# Altium PCB HAB_V01R01.PcbDoc (part 3 of 3)
Units mil, origin at the board's own origin, x right, y up, seen from the top; angles counter-clockwise.
Board outline 3149.61 x 1574.8 mil, 4 copper layers ([L1] Top Layer, [L2] GND, [L3] PWR, [L4] Bottom Layer), stack 61.811 mil thick; 74 components, 79 nets, 377 pads, 164 vias.
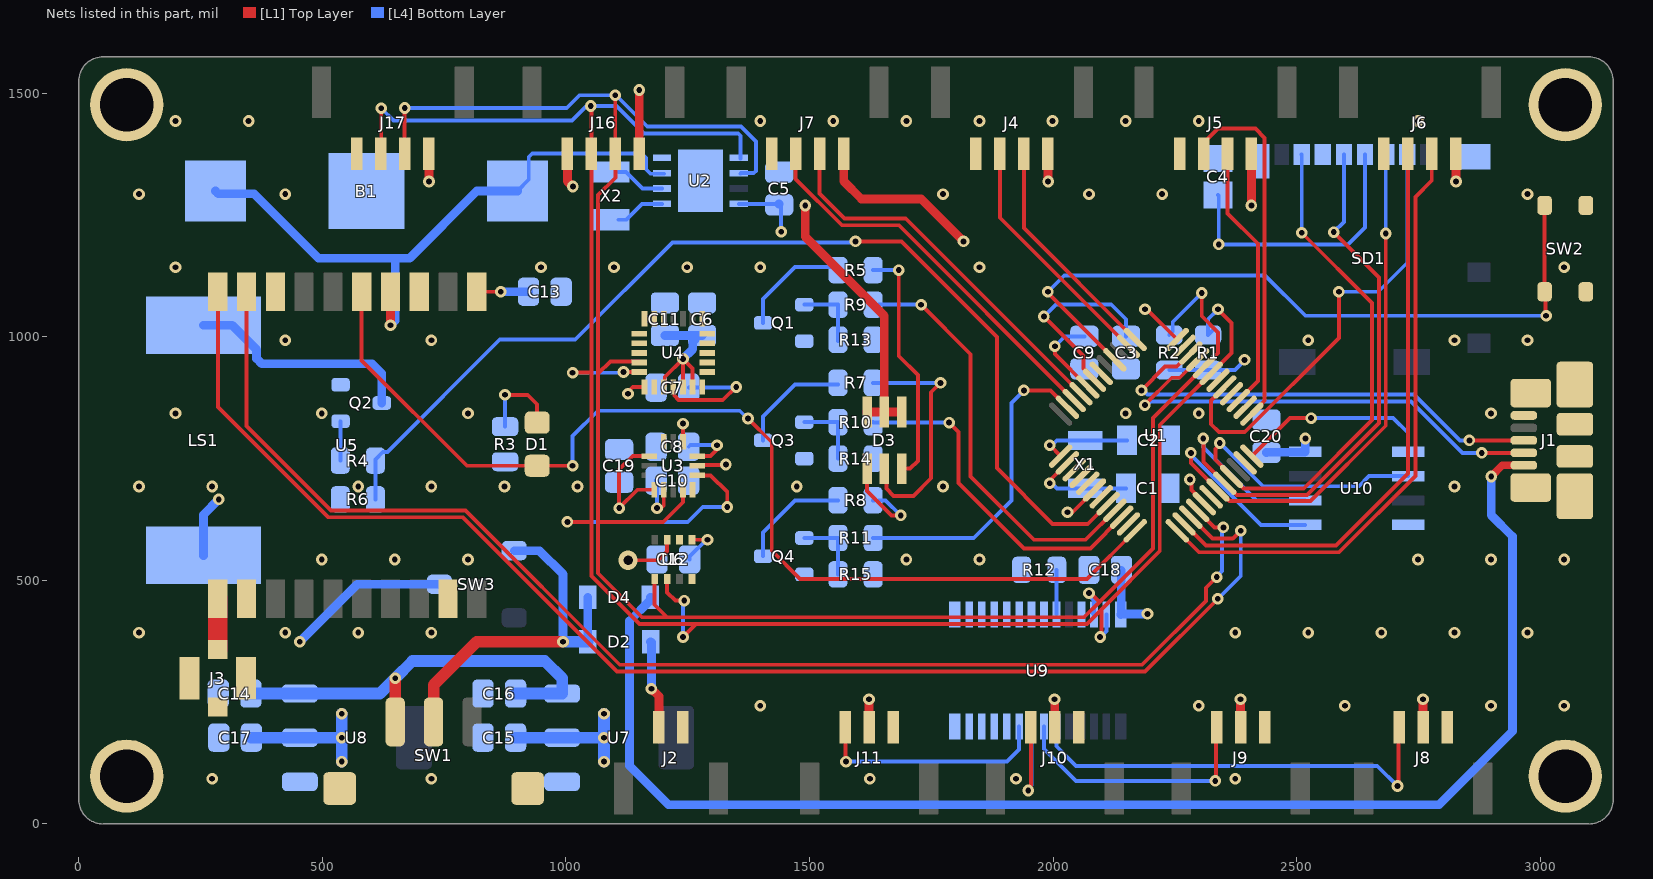
[diagram p4: the nets of this part, all layers, seen from the top]

## Part data (continued)
X1: library part CMP-2000-07587-1, "Tuning Fork Crystal, 32.768 KHz, +/- 20 ppm, -40 to 85 degC, 2-Pin SMD, RoHS, Tape and Reel", Case\/Package=SMD/SMT, ESR (Equivalent Series Resistance)=55KOhm, Frequency=32.768KHz, Frequency Tolerance=20ppm, Load Capacitance=6pF, Manufacturer=Abracon, Max Operating Temperature=85degC, Min Operating Temperature=-40degC, Package Description="2-Pin Surface Mount Device, Body 3.2 x 1.5 mm", Package Quantity=3000, Package Reference=ABS07, Series Resistance=60KOhm, Datasheet URL=http://www.abracon.com/Resonators/ABS07-120-32.768kHz-T.pdf, Datasheet Version=11/2014, Depth=1.5mm, Height=0.035inch, Lead Free=LeadFree, Length=3.2mm, Manufacturer URL=http://www.abracon.com/, Mount=SurfaceMount, Mounting Technology=SurfaceMount, Number of Pins=2, Packaging=TapeandReel, Radiation Hardening=No, REACH SVHC=NoSVHC, RoHSCompliant=True, Termination=SMD/SMT, Tolerance=20ppm, Width=0.061inch
X2: "In a Pack of 10, Abracon 32.768kHz Crystal Unit ±20ppm SMD 2-Pin 3.2 x 1.5 x 0.9mm", Case/Package=CSMD, ESR (Equivalent Series Resistance)=70kR, Frequency=32.768kHz, Frequency Stability=20ppm, Insulation Resistance=500MR, Load Capacitance=7pF, Manufacturer=Abracon, Max Operating Temperature=85°C, Min Operating Temperature=-40°C, Package Quantity=3000, Supplier Part Number 1=535-9543-1-ND, Category=Crystals, ComponentLink1Description=https://datasheet.ciiva.com/3174/abs07-3174144.pdf?src-supplier=Avnet, ComponentLink1URL=https://datasheet.ciiva.com/3174/abs07-3174144.pdf?src-supplier=Avnet, ComponentLink2Description=https://datasheet.ciiva.com/855/abs07-855947.pdf?src-supplier=Digi-Key, ComponentLink2URL=https://datasheet.ciiva.com/855/abs07-855947.pdf?src-supplier=Digi-Key, ComponentLink3Description=https://datasheet.ciiva.com/16199/abs07-16199467.pdf?src-supplier=Future+Electronics, ComponentLink3URL=https://datasheet.ciiva.com/16199/abs07-16199467.pdf?src-supplier=Future+Electronics, ComponentLink4Description=https://datasheet.ciiva.com/8344/abs07-8344589.pdf?src-supplier=Avnet, ComponentLink4URL=https://datasheet.ciiva.com/8344/abs07-8344589.pdf?src-supplier=Avnet, ComponentLink5Description=https://datasheet.ciiva.com/855/abs07-855945.pdf?src-supplier=Digi-Key, ComponentLink5URL=https://datasheet.ciiva.com/855/abs07-855945.pdf?src-supplier=Digi-Key, ComponentLink6Description=https://datasheet.ciiva.com/855/abs07-855946.pdf?src-supplier=Digi-Key, ComponentLink6URL=https://datasheet.ciiva.com/855/abs07-855946.pdf?src-supplier=Digi-Key, Depth=1.5mm, Frequency Tolerance=20ppm, Height=0.035inch, Lead Free="Lead Free", Length=3.2mm, Manufacturer Part Number=ABS07-32.768KHZ-7-T, Mount="Surface Mount", Number of Pins=2, Packaging="Tape and Reel", Pricing 1="1=1.09000, 10=0.96100, 50=0.89880, 100=0.79420, 500=0.75240, 1000=0.62700 (USD)", Radiation Hardening=No, REACH SVHC="No SVHC", RoHS=Yes, Series Resistance=70kR, Stock 1=166337, Supplier 1=Digi-Key, Termination=SMD/SMT, Tolerance=20ppm, Width=1.5mm

## Free pads (board coordinates)
  round 150 hole 110: M1(98.43,1476.38) M2(98.43,98.43) M3(3051.18,98.43) M4(3051.18,1476.38)

## Via types
v1: diameter 24, hole 12, [L1] Top Layer to [L4] Bottom Layer, tented both sides, 163 vias
v2: diameter 39.37, hole 19.68, [L1] Top Layer to [L4] Bottom Layer, 1 vias

## Nets (pads, with @x,y where several pads share a name; then routed paths per layer and width w, separated by ;. In a path a pad name is that pad's centre, name@x,y a point inside that pad or via, vN(x,y) a via of type N, cw(c..) or ccw(c..) an arc to the next point about the centre after c; other vN are vias at no path point)
3V3: C4.1 C5.2 C6.2 C9.2 C11.2 C12.2 C13.2 C15.2 C18.2 C19.2 C20.2 J7.1 R1.2 R2.2 SD1.4 U1.6 U1.17 U1.36 U1.44 U2.8 U3.1 U3.7 U3.10 U3.14 U4.13 U4.15 U4.17 U4.18 U5.1 U6.6 U6.8 U7.2 U9.28 U10.8 | length 3237.1
  [L1] Top Layer w8: U5.1@816.93,1092.52 v1(866.14,1092.52) ; v1(1127.22,883.14) 1127.22,887.27 1137.01,897.06 1161.38,897.06 U4.13@1161.42,897.09 ; v2(1127.63,541.34) 1189.66,541.34 1207.68,559.35 U6.6@1207.68,583.51 ; U3.14@1171.26,755 1137.01,755 1109.25,727.24 v1(1109.25,648.31) 1147.05,686.1 U3.1@1181.1,686.1 ; U4.15@1200.79,897.09 1202.69,899 1202.69,917.26 v1(1240.16,954.72) ; U3.10@1240.16,784.53 v1(1240.16,821.85) ; U4.17@1240.16,897.09 v1(1240.16,954.72) ; U6.8@1258.86,583.51 v1(1290.35,583.51) ; U4.18@1259.84,897.09 1259.84,935.04 v1(1240.16,954.72) ; U3.7@1269.69,735.31 1270.96,736.59 1326.97,736.59 v1(1328.24,737.86) ; v1(2003.46,980.57) 2003.46,964.62 U1.44@2071.03,897.06 ; v1(2029.27,639.76) 2039.23,639.76 U1.6@2084.95,685.48 ; v1(2188.35,1056.43) 2192.82,1056.43 U1.36@2254.76,994.49 ; v1(2280.56,706.95) 2283.62,703.89 2283.62,685.5 2310.44,658.67 U1.17@2310.44,657.64
  [L1] Top Layer w18: J7.1@1570.12,1375.73 1570.12,1319.15 1606.47,1282.8 1729.01,1282.8 v1(1815.94,1195.87)
  [L4] Bottom Layer w8: v1(1109.25,648.31) C19.2@1109.25,701.7 ; C12.2@1253.94,543.16 1253.94,548.67 1288.78,583.51 v1(1290.35,583.51) ; U2.8@1354.72,1272.72 C5.2@1437.12,1272.72 ; C5.2@1441.59,1269.69 1441.59,1215.89 v1(1441.93,1215.55) ; v1(2003.46,980.57) 2023.87,1000.98 C9.2@2063.98,1000.98 ; R2.2@2238.19,931.5 R1.2@2317.91,931.5 2373.43,931.5 2392.93,951 v1(2392.93,952.73) ; C4.1@2338.28,1291.34 2339.92,1289.7 v1(2339.92,1189.73) 2605.58,1189.73 2640.26,1224.41 SD1.4@2640.26,1374.51
  [L4] Bottom Layer w18: v1(866.14,1092.52) C13.2@923.23,1092.52 ; C11.2@1203.23,1002.65 C6.2@1272.89,1002.65 ; v1(1240.16,954.72) 1260.2,974.77 1260.2,989.96 C6.2@1272.89,1002.65 ; C6.2@1279.53,1002.65 C6.2@1272.89,1002.65 ; C5.2@1437.12,1272.72 C5.2@1437.23,1272.61 ; U9.28@2138.78,430.12 2139.94,431.27 v1(2193.76,431.27) ; U9.28@2139.59,431.27 C18.2@2139.59,520.84 ; C20.2@2437.7,762.31 2438.53,763.14 2516.45,763.14 U10.8@2517.28,763.98 2517.66,764.36 v1(2517.66,791.18)
  [L4] Bottom Layer w24: C15.2@896.65,177.17 U7.2@992.13,177.17 v1(1078.25,177.17) ; v1(1078.25,127.95) v1(1078.25,177.17) ; v1(1078.25,226.38) v1(1078.25,177.17)
5V0: C17.2 D3.4 D3.5 D3.6 J4.1 J5.1 J6.1 J8.2 J9.2 J10.2 J11.2 J16.1 J17.1 LS1.1 SW3.2 U8.2 | length 1943.8
  [L1] Top Layer w8: v1(1622.02,255.91) v1@1622.28,255.65 ; J11.2@1622.28,199.08 J11.2@1622.54,198.82 ; v1(2406.85,1269.69) v1@2407.07,1269.91
  [L1] Top Layer w18: v1@718.76,1319.15 J17.1@718.76,1375.73 ; v1(1150.32,1506.66) 1150.32,1376.4 1150.66,1376.06 J16.1@1150.59,1375.98 ; v1(1491.15,1269.7) 1491.15,1205.7 1653.54,1043.31 D3.5@1653.54,845.47 ; D3.6@1618.11,845.47 D3.5@1653.54,845.47 ; J11.2@1622.28,199.08 v1@1622.28,255.65 ; D3.4@1688.98,845.47 D3.5@1653.54,845.47 ; v1@1989.41,1319.15 J4.1@1989.41,1375.73 ; J10.2@2003.2,199.08 v1@2003.2,255.65 ; J9.2@2384.72,199.08 v1@2384.72,255.65 ; v1@2407.07,1269.91 J5.1@2407.07,1375.98 ; J8.2@2759.34,199.08 v1@2759.34,255.65 ; v1@2826.62,1319.15 J6.1@2826.62,1375.73
  [L4] Bottom Layer w18: LS1.1@255.91,551.18 255.91,634.84 v1(287.4,666.34) ; v1(453.74,374.18) 571.68,492.13 SW3.2@740.16,492.13
  [L4] Bottom Layer w24: C17.2@354.33,177.17 U8.2@453.74,177.17 v1(539.86,177.17) ; v1(539.86,127.95) v1(539.86,177.17) ; v1(539.86,226.38) v1(539.86,177.17)
  other v1: 2002.95,255.91 2384.46,255.91 2759.08,255.91 719.02,1318.9 1989.67,1318.9 2826.87,1318.9
GND: B1.2 C1.2 C2.2 C3.1 C4.2 C5.1 C6.1 C7.1 C8.1 C9.1 C10.1 C11.1 C12.1 C13.1 C14.1 C15.1 C16.1 C17.1 C18.1 C19.1 C20.1 J1.0 J1.5 J2.2 J3.2 J3.3 J3.4 J4.4 J5.4 J6.4 J7.4 J8.3 J9.3 J10.3 J11.3 J16.4 J17.4 pad.M1 pad.M2 pad.M3 pad.M4 Q1.2 Q2.2 Q3.2 Q4.2 R3.1 R6.1 R12.2 R13.1 R14.1 R15.1 SD1.6 SD1.11 SD1.12 SW1.0 SW2.3 SW2.4 U1.5 U1.18 U1.35 U1.42 U2.4 U2.9 U3.5 U3.12 U4.1 U4.5 U4.6 U4.7 U4.8 U4.9 U4.10 U4.14 U4.19 U4.20 U4.21 U4.22 U4.23 U4.24 U5.3 U5.8 U5.12 U5.19 U6.1 U6.7 U7.1 U8.1 U9.14 U9.25 U10.4 | length 72.3
  [L1] Top Layer w18: J16.4@1002.95,1375.98 1002.95,1319.54 v1(1014.15,1308.34)
  other v1: 273.74,92.83 723.74,92.83 1623.74,92.83 1923.74,92.83 2373.74,92.83 1398.74,242.83 2298.74,242.83 2598.74,242.83 2898.74,242.83 3048.74,242.83 123.74,392.83 423.74,392.83 573.74,392.83 723.74,392.83 2373.74,392.83 2523.74,392.83 2673.74,392.83 2823.74,392.83 2973.74,392.83 498.74,542.83 648.74,542.83 798.74,542.83 1698.74,542.83 1848.74,542.83 2748.74,542.83 2898.74,542.83 3048.74,542.83 123.74,692.83 273.74,692.83 573.74,692.83 723.74,692.83 873.74,692.83 1023.74,692.83 1473.74,692.83 1773.74,692.83 2823.74,692.83 198.74,842.83 498.74,842.83 798.74,842.83 2148.74,842.83 2298.74,842.83 2898.74,842.83 423.74,992.83 723.74,992.83 2523.74,992.83 2823.74,992.83 2973.74,992.83 198.74,1142.83 948.74,1142.83 1098.74,1142.83 1248.74,1142.83 1398.74,1142.83 1848.74,1142.83 3048.74,1142.83 123.74,1292.83 423.74,1292.83 1773.74,1292.83 2073.74,1292.83 2223.74,1292.83 2973.74,1292.83 198.74,1442.83 348.74,1442.83 1398.74,1442.83 1548.74,1442.83 1698.74,1442.83 1848.74,1442.83 1998.74,1442.83 2148.74,1442.83 2298.74,1442.83 2748.74,1442.83
GPS_EX_ANT: J3.1 U5.11 | length 104.3
  [L1] Top Layer w39.5: J3.1@285.43,358.27 U5.11@285.43,462.6
MCU_A0: U1.3 | length 0
MCU_A1: U1.7 | length 0
MCU_A2: R4.1 R6.2 U1.8 | length 2186.6
  [L1] Top Layer w8: v1(1594.49,1195.87) 1688.35,1195.87 1884.4,999.81 1884.4,730.36 1998.88,615.88 2071.03,615.88 U1.8@2112.79,657.64
  [L4] Bottom Layer w8: R6.2@608.86,666.34 608.86,748.29 623.89,763.32 633.4,763.32 864.17,994.09 1019.17,994.09 1218.63,1193.55 1592.17,1193.55 v1(1594.49,1195.87)
MCU_A3: R9.2 U1.9 | length 870.5
  [L1] Top Layer w8: v1(1729.01,1065.94) 1830.71,964.24 1830.71,713.59 1960.79,583.51 2066.49,583.51 U1.9@2126.71,643.72
  [L4] Bottom Layer w8: R9.2@1630.51,1065.94 1633.74,1069.17 1636.97,1065.94 v1(1729.01,1065.94)
MCU_A4: R10.2 U1.10 | length 705.1
  [L1] Top Layer w8: v1(1786.42,823.9) 1806.1,804.21 1806.1,699.69 1939.94,565.84 2076.67,565.84 U1.10@2140.63,629.8
  [L4] Bottom Layer w8: R10.2@1630.51,824.8 1631.42,823.9 v1(1786.42,823.9)
MCU_A5: R11.2 U1.47 | length 655.8
  [L1] Top Layer w8: v1(1939.94,890.01) 1994.56,890.01 U1.47@2029.27,855.3
  [L4] Bottom Layer w8: R11.2@1630.51,587.04 1837.04,587.04 1914.37,664.37 1914.37,864.44 v1(1939.94,890.01)
MCU_AREF: U1.4
MCU_D2: U1.23
MCU_D5: U1.24 U10.1 | length 405.3
  [L1] Top Layer w8: U1.24@2406.85,755.08 U1.24@2407.88,755.08 2485.9,833.1 v1(2529.53,833.1)
  [L4] Bottom Layer w8: v1(2529.53,833.1) 2697.85,833.1 2728.78,802.17 U10.1@2728.78,763.98
MCU_D6: SD1.2 U1.29 | length 920.7
  [L1] Top Layer w8: U1.29@2353.23,897.06 U1.29@2352.2,897.06 2324.2,869.06 2324.2,820.53 2340.37,804.36 2393.35,804.36 2586.43,997.44 v1(2586.43,1092.52)
  [L4] Bottom Layer w8: v1(2586.43,1092.52) 2667.32,1092.52 2726.87,1152.07 SD1.2@2726.87,1374.51
MCU_D7: U1.30
MCU_D8: U1.11
MCU_D9: D1.A U1.12 U5.5 | length 2215.2
  [L1] Top Layer w8: U5.5@580.71,1092.52 580.71,951.21 796.6,735.31 D1.A@940.94,735.31 v1(1013.78,735.31) ; v1(1373.81,832.22) 1422.43,783.6 1422.43,561.01 1480.35,503.09 2069.59,503.09 U1.12@2168.46,601.96
  [L4] Bottom Layer w8: v1(1013.78,735.31) 1013.78,796.02 1066.03,848.27 1356.71,848.27 1372.76,832.22 v1(1373.81,832.22)
MCU_D12: U1.28
MCU_D13: U1.26 | length 1
  [L1] Top Layer w8: U1.26@2392.93,855.3 U1.26@2393.96,855.3
MCU_MISO: SD1.7 U1.21 U10.2 | length 1481.1
  [L1] Top Layer w8: v1(2342.09,782.16) 2342.09,778.74 2332.83,769.47 2332.83,747.64 2366.12,714.35 U1.21@2366.12,713.32 U1.21@2366.12,713.32 2390.81,688.69 2514.41,688.69 2654.65,828.93 2654.65,1069.17 v1(2510.33,1213.49)
  [L4] Bottom Layer w8: v1(2342.09,782.16) 2430.94,693.31 2627.85,693.31 2648.52,713.98 U10.2@2728.78,713.98 ; v1(2510.33,1213.49) 2510.33,1373.53 2509.84,1374.02 SD1.7@2510.33,1374.51
MCU_MOSI: SD1.3 U1.19 U10.5 | length 1376.6
  [L1] Top Layer w8: v1(2282.6,761.81) 2282.6,741.16 U1.19@2338.28,685.48 2339.31,685.48 2361.94,662.86 2528.17,662.86 2682.67,817.35 v1(2682.67,1211.86)
  [L4] Bottom Layer w8: v1(2282.6,761.81) 2282.6,757.6 2426.22,613.98 U10.5@2517.28,613.98 ; v1(2682.67,1211.86) 2682.67,1364.95 2678.34,1369.28 SD1.3@2683.56,1374.51
MCU_RESET#: SW2.1 SW2.2 U1.40 | length 1495.2
  [L1] Top Layer w8: v1(1989.16,1092.52) 1989.16,1090.28 U1.40@2126.71,952.73 ; SW2.1@3008.86,1269.69 SW2.2@3008.86,1092.52 3010.33,1091.04 3010.33,1044.78 v1(3011.81,1043.31)
  [L4] Bottom Layer w8: v1(1989.16,1092.52) 2022.72,1126.08 2434.89,1126.08 2517.66,1043.31 v1(3011.81,1043.31)
MCU_RX_1: U1.16 U5.9 | length 2736.2
  [L1] Top Layer w8: U5.9@344.49,1092.52 344.49,816.93 517.69,643.72 793.4,643.72 1110.35,326.77 2182.55,326.77 2313.88,458.1 2313.88,484.89 v1(2335.76,506.78) ; U1.16@2296.52,642.69 U1.16@2296.52,643.72 2331.37,608.87 v1(2349.35,608.87)
  [L4] Bottom Layer w8: v1(2335.76,506.78) 2335.76,508.34 2346.89,519.46 2346.89,606.41 v1(2349.35,608.87)
MCU_RX_2: J5.3 U1.25 | length 745.1
  [L1] Top Layer w8: J5.3@2308.64,1375.98 2308.64,1397.64 2338.17,1427.17 2415.31,1427.17 2434.19,1408.28 2434.19,868.72 2407.88,842.41 U1.25@2407.88,841.38
MCU_RX_3: J6.3 U1.14 | length 1195.5
  [L1] Top Layer w8: U1.14@2268.68,615.88 2269.72,615.88 2313.88,571.72 2580.63,571.72 2727.94,719.03 J6.3@2727.94,1375.98
MCU_RX_5: J4.3 U1.38 | length 504.7
  [L1] Top Layer w8: J4.3@1890.73,1375.98 1890.73,1244.39 U1.38@2154.54,980.57
MCU_SCK: SD1.5 U1.20 U10.6 | length 1368.5
  [L1] Top Layer w8: v1(2308.21,791.18) 2308.21,743.39 U1.20@2352.2,699.4 2352.88,699.4 2376.89,675.39 2520.91,675.39 2668.67,823.15 2668.67,1121.97 v1(2575.82,1214.82)
  [L4] Bottom Layer w8: v1(2308.21,791.18) 2308.21,773.13 2416.97,664.37 2516.89,664.37 U10.6@2517.28,663.98 ; v1(2575.82,1214.82) 2596.76,1235.76 2596.76,1374.32 SD1.5@2596.95,1374.51
MCU_SCL: J16.2 J17.2 R2.1 U1.32 U2.6 U3.4 U4.11 U6.4 U9.26 | length 4378.7
  [L1] Top Layer w8: v1(668.99,1469.46) 668.99,1376.29 J17.2@669.29,1375.98 ; v1(1101.09,1495.72) 1101.09,1378.88 1102.36,1377.61 1101.06,1376.3 J16.2@1101.38,1375.98 1101.38,1326.39 1066.17,1291.18 1066.17,924.48 ; U4.11@1150.59,947.29 1148.69,949.19 1127.63,949.19 1127.22,949.6 1091.29,949.6 1066.17,924.48 ; U6.4@1182.09,502.8 1182.09,450.02 1207.68,424.43 ; U3.4@1240.16,686.1 1240.16,660.46 1199.78,620.08 1066.17,620.08 ; v1(2073.48,473.8) 2076.92,473.8 2094.8,455.92 ; v1(2305.03,1089.86) 2305.03,1042.34 2338.28,1009.09 2338.28,966.65 U1.32@2310.44,938.81 2204.72,833.1 2204.72,565.84 2094.8,455.92 ; 1066.17,620.08 1066.17,924.48 ; 1066.17,620.08 1066.17,514.66 1156.39,424.43 1207.68,424.43 ; 1207.68,424.43 2063.31,424.43 2094.8,455.92
  [L4] Bottom Layer w8: v1(668.99,1469.46) 1001.62,1469.46 1027.88,1495.72 1102.5,1495.72 1166.83,1431.39 1359.43,1431.39 1390.07,1400.74 1390.07,1340.52 1385.39,1335.83 1359.57,1335.83 U2.6@1358.38,1334.65 ; v1(2073.48,473.8) v1@2075.2,473.8 ; v1@2073.73,469.47 2084.19,459.01 2084.19,430.64 U9.26@2083.66,430.12 U9.26@2079.79,433.99 ; R2.1@2238.19,1003.54 2245.51,1010.87 2245.51,1030.35 v1(2305.03,1089.86)
MCU_SDA: J16.3 J17.3 R1.1 U1.31 U2.5 U3.6 U4.12 U6.3 U9.27 | length 4769.4
  [L1] Top Layer w8: J17.3@620.08,1375.98 620.85,1376.76 v1(620.85,1469.1) ; v1(1002.95,620.08) 1052.17,620.08 ; v1(1013.78,926.21) 1014.15,926.58 1052.17,926.58 ; v1(1050.73,1473.64) 1052.66,1471.72 1052.66,1376.48 J16.3@1052.17,1375.98 1052.17,926.58 ; v1(1118.11,927.6) U4.12@1150.59,927.6 ; U6.3@1207.68,502.8 1207.68,475.52 1224.71,458.49 v1(1242.68,458.49) ; v1(1240.16,383.86) 1266.73,410.43 ; U3.6@1269.69,715.63 1297,715.63 1331.17,681.46 v1(1331.17,650.8) ; v1(2096.46,383.86) 2098.87,386.27 2098.87,440.19 ; v1(2338.28,1056.43) 2366.12,1028.59 2366.12,966.65 U1.31@2324.36,924.9 2218.72,819.26 2218.72,560.04 2098.87,440.19 ; 1052.17,620.08 1052.17,926.58 ; 1052.17,620.08 1052.17,508.86 1150.59,410.43 1266.73,410.43 ; 1266.73,410.43 2069.11,410.43 2098.87,440.19
  [L4] Bottom Layer w8: v1(620.85,1469.1) 645.81,1444.14 1012.5,1444.14 1042,1473.64 v1(1050.73,1473.64) 1104.02,1473.64 1160.34,1417.32 1353.69,1417.32 1358.38,1412.64 U2.5@1358.38,1366.14 ; v1(1002.95,620.08) 1250,620.08 1280.72,650.8 v1(1331.17,650.8) ; v1(1013.78,926.21) 1116.71,926.21 v1(1118.11,927.6) ; v1(1240.16,383.86) 1240.16,455.97 v1(1242.68,458.49) ; v1(2096.46,383.86) 2097.17,383.86 2109.25,395.94 U9.27@2109.25,430.12 ; R1.1@2328.13,1013.76 R1.1@2317.91,1003.54 2317.91,1036.06 v1(2338.28,1056.43)
MCU_SWCLK: J7.2 U1.45 | length 788.4
  [L1] Top Layer w8: J7.2@1520.65,1375.98 1520.65,1294.31 1572.08,1242.88 1697.36,1242.88 U1.45@2057.11,883.14
MCU_SWDIO: J7.3 U1.46 | length 812.3
  [L1] Top Layer w8: J7.3@1471.44,1375.98 1471.44,1323.66 1566.22,1228.88 1683.52,1228.88 U1.46@2043.19,869.22
MCU_TX_1: U1.15 U5.10 | length 2863.4
  [L1] Top Layer w8: U5.10@285.43,1092.52 285.43,856.19 511.9,629.72 787.6,629.72 1104.55,312.77 2188.35,312.77 v1(2337.78,462.2) ; U1.15@2282.6,628.77 U1.15@2282.6,629.8 2326.69,585.72 2368.73,585.72 v1(2384.98,601.96)
  [L4] Bottom Layer w8: v1(2337.78,462.2) 2384.98,509.4 v1(2384.98,601.96)
MCU_TX_2: J5.2 U1.27 | length 549.2
  [L1] Top Layer w8: J5.2@2357.86,1375.98 2357.86,1253.35 2420.19,1191.02 2420.19,909.37 U1.27@2380.04,869.22
MCU_TX_3: J6.2 U1.13 | length 1247.3
  [L1] Top Layer w8: U1.13@2254.76,601.96 2299.01,557.72 2586.43,557.72 2743.41,714.7 2743.41,1286.71 2777.15,1320.46 J6.2@2777.15,1375.98
MCU_TX_5: J4.2 U1.37 | length 476.1
  [L1] Top Layer w8: J4.2@1939.94,1375.98 1939.94,1223.01 U1.37@2168.46,994.49
MCU_USB_D_N: J1.2 U1.33 | length 972.2
  [L1] Top Layer w8: v1(2188.29,859.77) 2188.29,860.83 2243.46,916.01 2259.79,916.01 U1.33@2296.52,952.73 ; v1(2879.7,761.81) J1.2@2966.14,761.81
  [L4] Bottom Layer w8: v1(2188.29,859.77) 2192.62,859.77 2200.3,867.45 2734.91,867.45 2840.55,761.81 v1(2879.7,761.81)
MCU_USB_D_P: J1.3 U1.34 | length 960.7
  [L1] Top Layer w8: v1(2181.15,890.01) 2229.96,938.81 2253.73,938.81 2281.57,966.65 U1.34@2282.6,966.65 ; v1(2854.33,787.4) J1.3@2966.14,787.4
  [L4] Bottom Layer w8: v1(2181.15,890.01) 2185.48,890.01 2193.76,881.74 2740.92,881.74 2835.26,787.4 v1(2854.33,787.4)
NetC1_1: C1.1 U1.2 X1.1 | length 217.6
  [L1] Top Layer w8: v1(1993.11,699.4) 1993.11,705 U1.2@2029.27,741.16
  [L4] Bottom Layer w8: v1(1993.11,699.4) 1997.44,699.4 2007.86,688.98 X1.1@2065.94,688.98 C1.1@2149.61,688.98
NetC2_1: C2.1 U1.1 X1.2 | length 194.2
  [L1] Top Layer w8: v1(1993.11,777.56) 2015.35,755.32 U1.1@2015.35,755.08
  [L4] Bottom Layer w8: v1(1993.11,777.56) 1997.44,777.56 2007.28,787.4 2012.8,787.4 X1.2@2065.94,787.4 C2.1@2151.57,787.4
NetC3_2: C3.2 U1.43 | length 400.2
  [L1] Top Layer w8: v1(1981,1041.57) 2061.99,960.58 2061.99,934.96 2084.95,912.01 U1.43@2084.95,910.98
  [L4] Bottom Layer w8: v1(1981,1041.57) 2005.87,1066.43 2119.29,1066.43 2149.61,1036.11 C3.2@2149.61,1000.98
NetC7_2: C7.2 U4.16 | length 258.6
  [L1] Top Layer w8: U4.16@1220.47,897.09 1222.38,895.19 1222.38,879.17 1231.32,870.23 1321.83,870.23 1348.66,897.06 v1(1349.39,897.06)
  [L4] Bottom Layer w8: C7.2@1251.97,895.6 1347.93,895.6 v1(1349.39,897.06)
NetC8_2: C8.2 U3.8 | length 114.3
  [L1] Top Layer w8: U3.8@1269.69,755 1296.34,755 1310.07,768.73 v1(1310.07,777.56)
  [L4] Bottom Layer w8: C8.2@1251.97,774.32 1255.21,777.56 v1(1310.07,777.56)
NetC10_2: C10.2 U3.2 | length 106.4
  [L1] Top Layer w8: v1(1187.01,648.31) 1187.95,647.36 1194.58,647.36 1200.79,653.57 U3.2@1200.79,686.1
  [L4] Bottom Layer w8: C10.2@1185.04,704.65 1187.01,702.68 v1(1187.01,648.31)
NetD1_C: D1.C R3.2 | length 179.1
  [L1] Top Layer w8: v1(875,880.91) 921.66,880.91 940.94,861.62 D1.C@940.94,821.85
  [L4] Bottom Layer w8: R3.2@875,815.55 v1(875,880.91)
NetD3_1: D3.1 R8.2 | length 205
  [L1] Top Layer w8: D3.1@1618.11,729.33 1618.11,683.38 1668.01,633.48 v1(1687.1,633.48)
  [L4] Bottom Layer w8: R8.2@1630.51,664.37 1656.21,664.37 v1(1687.1,633.48)
NetD3_2: D3.2 R7.2 | length 497.5
  [L1] Top Layer w8: D3.2@1653.54,729.33 1657.8,725.07 1657.8,688.31 1672.67,673.44 1713.02,673.44 1749.35,709.76 1749.35,886.18 v1(1768.68,905.51)
  [L4] Bottom Layer w8: R7.2@1630.51,905.51 v1(1768.68,905.51)
NetD3_3: D3.3 R5.2 | length 500.5
  [L1] Top Layer w8: v1(1683.01,1136.81) 1683.01,960.73 1722.44,921.31 1722.44,745.23 1706.54,729.33 D3.3@1688.98,729.33
  [L4] Bottom Layer w8: R5.2@1630.51,1136.81 v1(1683.01,1136.81)
NetLS1_2: LS1.2 Q2.3 | length 478.3
  [L4] Bottom Layer w18: LS1.2@255.91,1023.62 314.96,1023.62 365.02,973.57 365.02,955.43 375.56,944.88 601.97,944.88 622.05,924.8 Q2.3@622.05,864.17
NetQ1_1: Q1.1 R9.1 R13.2 | length 144.1
  [L4] Bottom Layer w8: Q1.1@1489.17,1065.94 R9.1@1558.46,1065.94 R13.2@1558.46,991.14
NetQ1_3: Q1.3 R5.1 | length 230
  [L4] Bottom Layer w8: Q1.3@1404.53,1028.54 1404.53,1077.28 1470.52,1143.27 R5.1@1558.46,1143.27
NetQ2_1: Q2.1 R4.2 | length 81
  [L4] Bottom Layer w8: R4.2@536.81,746.06 537.11,746.36 537.11,826.48 Q2.1@537.4,826.77
NetQ3_1: Q3.1 R10.1 R14.2 | length 144.1
  [L4] Bottom Layer w8: Q3.1@1489.17,824.8 R10.1@1558.46,824.8 R14.2@1558.46,750
NetQ3_3: Q3.3 R7.1 | length 230
  [L4] Bottom Layer w8: Q3.3@1404.53,787.4 1404.53,836.14 1470.52,902.13 R7.1@1558.46,902.13
NetQ4_1: Q4.1 R11.1 R15.2 | length 144.1
  [L4] Bottom Layer w8: Q4.1@1489.17,587.04 R11.1@1558.46,587.04 R15.2@1558.46,512.24
NetQ4_3: Q4.3 R8.1 | length 230
  [L4] Bottom Layer w8: Q4.3@1404.53,549.64 1404.53,598.38 1470.52,664.37 R8.1@1558.46,664.37
NetR12_1: R12.1 U9.23 | length 90.2
  [L4] Bottom Layer w8: U9.23@2007.16,431.23 R12.1@2007.16,521.39
NetU2_1: U2.1 X2.1 | length 103.4
  [L4] Bottom Layer w8: X2.1@1107.28,1240.16 1123.03,1240.16 1155.7,1272.83 U2.1@1197.13,1272.83
NetU2_2: U2.2 X2.2 | length 104
  [L4] Bottom Layer w8: X2.2@1107.28,1338.58 1123.03,1338.58 1157.29,1304.33 U2.2@1197.13,1304.33
PWM_0: J8.1 U9.6 | length 896.3
  [L1] Top Layer w8: v1(2706.69,77.95) 2706.69,78.74 2708.54,80.59 2708.54,196.97 J8.1@2710.38,198.82
  [L4] Bottom Layer w8: U9.6@2006.89,199.8 2006.89,159.5 2046.93,119.46 2665.19,119.46 v1(2706.69,77.95)
PWM_1: J9.1 U9.7 | length 538.5
  [L1] Top Layer w8: v1(2332.68,88.58) 2334.22,90.13 2334.22,197.28 J9.1@2335.76,198.82
  [L4] Bottom Layer w8: U9.7@1981.3,199.8 1981.3,154.22 2046.93,88.58 v1(2332.68,88.58) v1@2335.52,88.58
PWM_2: J10.1 U9.8 | length 265.9
  [L1] Top Layer w8: v1(1948.82,68.9) 1948.82,73.23 1954.25,78.66 J10.1@1954.25,198.82
  [L4] Bottom Layer w8: v1(1948.82,68.9) 1948.82,73.23 1955.71,80.12 U9.8@1955.71,199.8
PWM_3: J11.1 U9.9 | length 484.2
  [L1] Top Layer w8: J11.1@1573.32,198.82 1574.06,198.08 1574.06,128.69 v1(1574.8,127.95)
  [L4] Bottom Layer w8: v1(1574.8,127.95) 1905.51,127.95 1930.12,152.56 U9.9@1930.12,199.8
PWM_4: U9.10
PWM_5: U9.11
PWM_6: U9.12
PWM_7: U9.13
PWM_8: U9.15
PWM_9: U9.16
PWM_10: U9.17
PWM_11: U9.18
PWM_12: U9.19
PWM_13: U9.20
PWM_14: U9.21
PWM_15: U9.22
VBAT: D2.2 J2.1 | length 182.4
  [L1] Top Layer w18: v1(1175.37,277.48) 1190.94,261.91 J2.1@1190.94,198.82
  [L4] Bottom Layer w18: D2.2@1173.62,374.02 1175.37,372.26 v1(1175.37,277.48)
VBAT_BACKUP: B1.1 U2.3 U5.4 | length 1334.8
  [L1] Top Layer w18: v1(639.76,1023.62) U5.4@639.76,1092.52
  [L4] Bottom Layer w8: B1.1@900.39,1299.21 923.72,1322.54 923.72,1369.12 930.73,1376.13 1154.95,1376.13 1164.28,1366.8 1164.28,1343.99 1173.63,1334.65 U2.3@1200.9,1334.65
  [L4] Bottom Layer w18: B1.1@280.71,1299.21 286.14,1293.78 359.76,1293.78 492.13,1161.42 649.61,1161.42 ; v1(639.76,1023.62) 649.61,1033.46 649.61,1161.42 ; B1.1@900.39,1299.21 816.93,1299.21 679.13,1161.42 649.61,1161.42
VBUS: D2.1 D4.1 SW1.2 SW3.1 | length 779.5
  [L1] Top Layer w24: SW1.2@728.35,209.65 728.35,285.43 816.93,374.02 v1(994.09,374.02)
  [L4] Bottom Layer w18: SW3.1@893.7,561.02 945.43,561.02 994.09,512.36 v1(994.09,374.02) ; D4.1@1044.55,465.42 1044.71,465.26 1044.71,374.18 D2.1@1044.88,374.02
  [L4] Bottom Layer w24: v1(994.09,374.02) D2.1@1044.88,374.02
VINT: C14.2 C16.2 SW1.3 U7.3 U8.3 | length 890.9
  [L1] Top Layer w24: SW1.3@649.61,209.65 v1(649.61,299.21)
  [L4] Bottom Layer w24: C14.2@353.35,267.72 U8.3@453.74,267.72 618.11,267.72 v1(649.61,299.21) 685.04,334.65 956.69,334.65 992.13,299.21 U7.3@992.13,267.72 ; C16.2@896.65,267.72 U7.3@985.33,267.72
VUSB: D4.2 J1.1 | length 2889.3
  [L1] Top Layer w16: v1(2899.2,713.32) 2922.1,736.22 J1.1@2966.14,736.22
  [L4] Bottom Layer w18: D4.2@1173.29,465.42 1173.29,459.32 1130.54,416.58 1130.54,119.46 1210.63,39.37 2791.95,39.37 2942.91,190.33 2942.91,590.16 2899.2,633.88 v1(2899.2,713.32)
pads on no net: J1.4 J2.M J4.M J5.M J6.M J7.M J8.M J9.M J10.M J11.M J16.M J17.M SD1.1 SD1.8 SD1.9 SD1.10 SD1.13 SD1.14 SW1.1 SW3.3 U1.22 U1.39 U1.41 U1.48 U2.7 U3.3 U3.9 U3.11 U3.13 U3.15 U3.16 U4.2 U4.3 U4.4 U5.2 U5.6 U5.7 U5.13 U5.14 U5.15 U5.16 U5.17 U5.18 U5.20 U6.2 U6.5 U7.4 U8.4 U9.1 U9.2 U9.3 U9.4 U9.5 U9.24 U10.3 U10.7

## Polygon pours and split planes (outlines as drawn)
GND on [L4] Bottom Layer "Bottom GND Pour" (solid, shelved, pour order 2): 50,0 3099.61,0 ccw(c3099.61,50) 3149.61,50 3149.61,1524.8 ccw(c3099.61,1524.8) 3099.61,1574.8 50,1574.8 ccw(c50,1524.8) 0,1524.8 0,50 ccw(c50,50)
GND on [L2] GND "GND Layer Pour" (solid, shelved, pour order 3): 50,0 3099.61,0 ccw(c3099.61,50) 3149.61,50 3149.61,1524.8 ccw(c3099.61,1524.8) 3099.61,1574.8 50,1574.8 ccw(c50,1524.8) 0,1524.8 0,50 ccw(c50,50)
5V0 on [L3] PWR "5V0 PWR Plane Pour" (solid, shelved, pour order 7): 50,0 cw(c50,50) 0,50 0,1524.8 cw(c50,1524.8) 50,1574.8 3099.61,1574.8 cw(c3099.61,1524.8) 3149.61,1524.8 3149.61,50 cw(c3099.61,50) 3099.61,0 1507.47,0 1505.91,1.56 1505.91,226.38 1574.8,295.28 2706.69,295.28 2800.2,388.78 2800.2,1195.87 2755.46,1240.61 674.66,1240.61 516.73,1082.68 516.73,369.09 590.55,295.28 590.55,0
3V3 on [L3] PWR "3V3 PWR Plane Pour" (solid, shelved, pour order 6): 590.55,295.28 516.73,369.09 516.73,1082.68 674.66,1240.61 2755.46,1240.61 2800.2,1195.87 2800.2,388.78 2706.69,295.28 1574.8,295.28 1505.91,226.38 1505.91,1.56 1505.91,0 590.55,0
GND on [L1] Top Layer "Top GND Pour" (solid, shelved, pour order 1): 50,0 3099.61,0 ccw(c3099.61,50) 3149.61,50 3149.61,1524.8 ccw(c3099.61,1524.8) 3099.61,1574.8 50,1574.8 ccw(c50,1524.8) 0,1524.8 0,50 ccw(c50,50)

## Silkscreen, mask and mechanical layers (free items; w line width, h text height)
Top Overlay:
  circle w20: c3011.1,477.8 r5
  region: 3008.45,227.95 3008.45,267.11 3034.6,247.53
  region: 3030.75,363.31 2991.58,363.31 3010.19,393.83
  lines w8: 2992.93,247.53 3008.45,247.53 ; 3011.1,346.89 3011.1,363.19
  text "I2C" at 787.26,1324.88 h80 r180
  text "I2C" at 1230.18,1324.88 h80 r180
  text "PROG" at 1643.56,1324.88 h80 r180
  text "UART 5" at 2061.87,1324.88 h80 r180
  text "UART 2" at 2490.02,1324.88 h80 r180
  text "UART 3" at 2901.36,1324.88 h80 r180
  text "RESET" at 2958.66,1055.38 h60 r90
  text "Z" at 3031.65,511.56 h80 r90
  text "Designed by James / www.outoftolerance.com" at 2716.53,421.57 h80 r90
  text "Y" at 3030.75,393.98 h80 r90
  text "X" at 3031.65,274.16 h80 r90
  text "BAT" at 1164.64,247.53 h80
  text "PWM 3" at 1496.56,247.53 h80
  text "PWM 2" at 1877.48,247.53 h80
  text "PWM 1" at 2266.01,247.53 h80
  text "PWM 0" at 2635.38,247.53 h80
  text "+" at 1115.94,221.25 h80 r90
  text "-" at 1313.77,217.23 h80 r358.85
  text "OFF" at 895.67,194.59 h40 r90
  text "ON" at 610.24,192.05 h40 r90
  text "V1.0 MAY 2020" at 3096.53,157.99 h80 r90
  text "ICARUS" at 165.48,98.43 h260 r90
Bottom Overlay:
  text "!" at 893.31,669.09 h300 r90
  text "5V0" at 402.56,60.83 h80
  text "3V3" at 940.94,60.83 h80
Cutout:
  lines w8: 0,50 ccw(c50,50) 50,0 98.43,0 2312.2,0 3099.61,0 ccw(c3099.61,50) 3149.61,50 3149.61,1524.8 ccw(c3099.61,1524.8) 3099.61,1574.8 50,1574.8 ccw(c50,1524.8) 0,1524.8 0,50
[M15] Board Outline:
  lines w8: 0,50 ccw(c50,50) 50,0 98.43,0 2312.2,0 3099.61,0 ccw(c3099.61,50) 3149.61,50 3149.61,1524.8 ccw(c3099.61,1524.8) 3099.61,1574.8 50,1574.8 ccw(c50,1524.8) 0,1524.8 0,50